# Altium PCB PIDPCB.PcbDoc
Units mm, origin at the board's own origin, x right, y up, seen from the top; angles counter-clockwise.
Board outline 129.54 x 78.49 mm, 2 copper layers (Top Layer, Bottom Layer); 55 components, 89 nets, 166 pads, 6 vias.
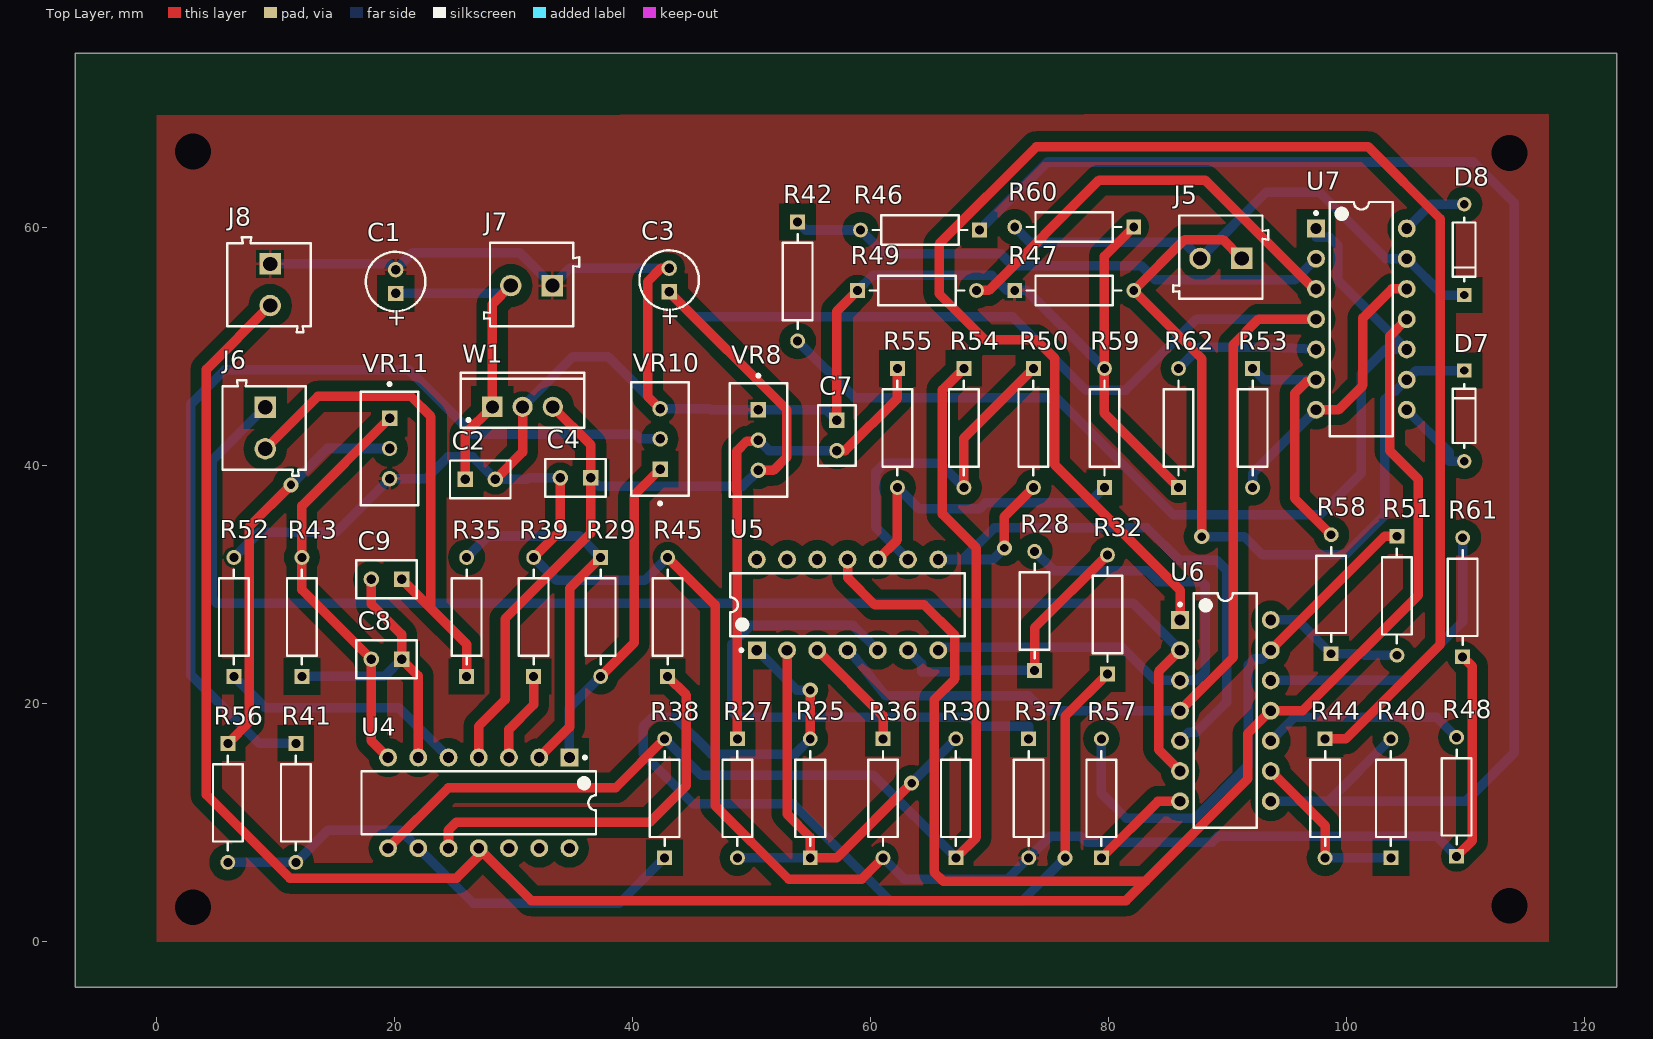
[diagram p0: Top Layer view]
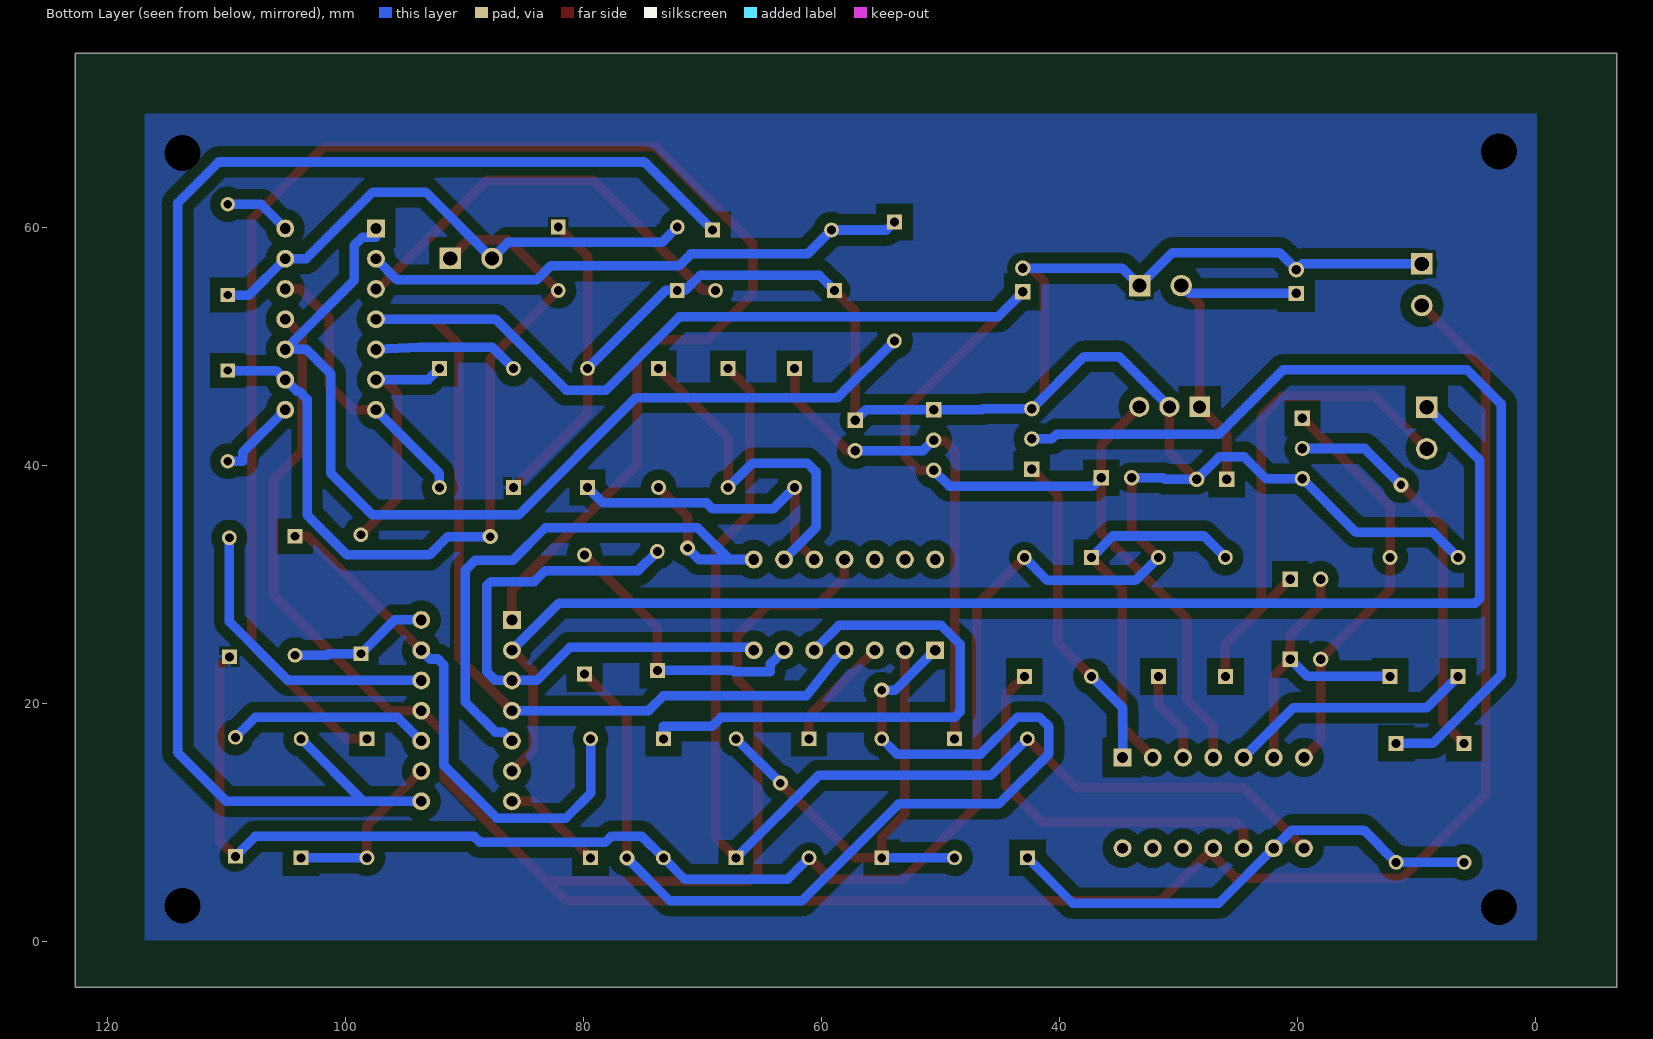
[diagram p1: Bottom Layer view, seen from below]
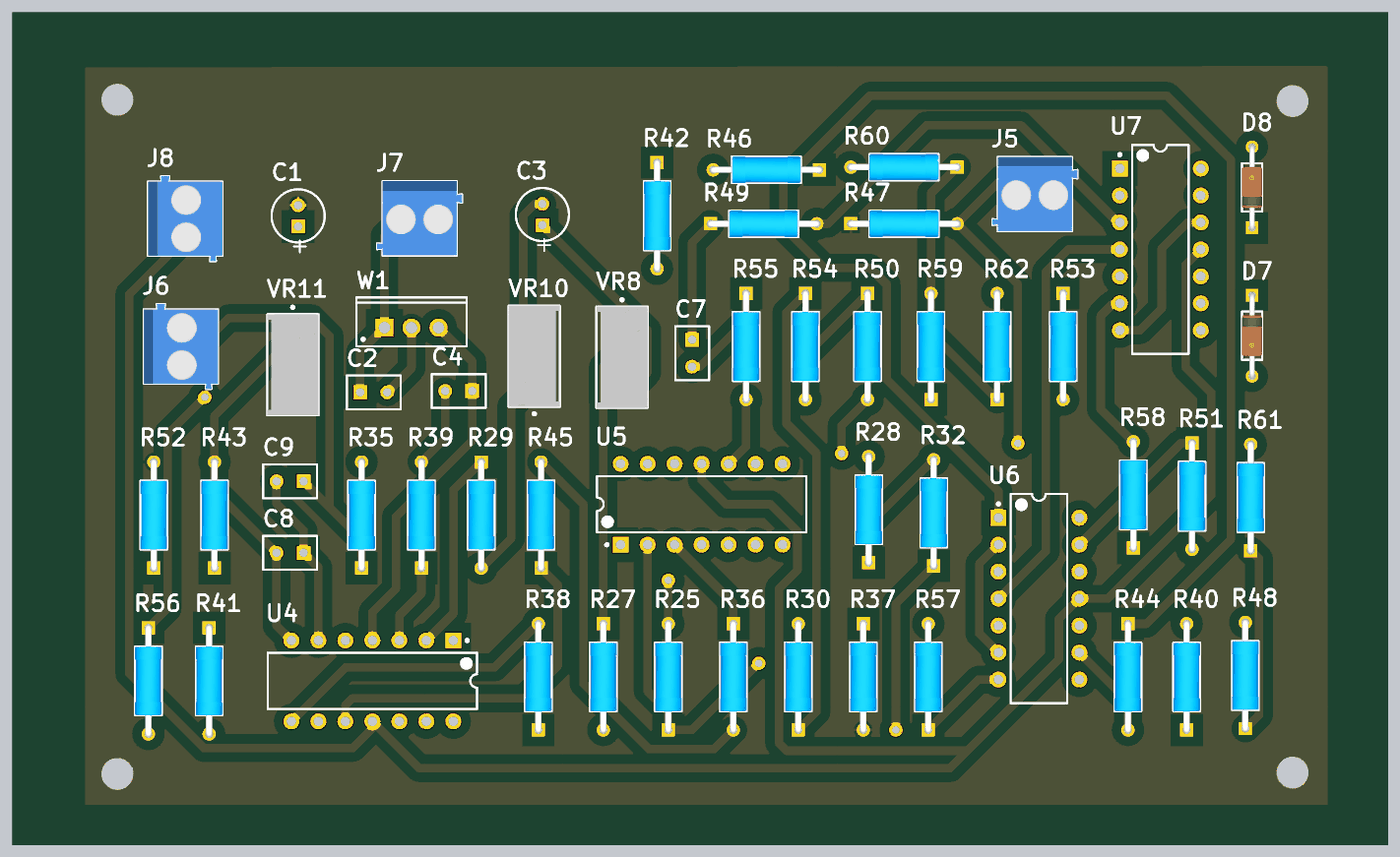
[diagram p2: 3D render of the assembled board from above, using the file's embedded part models]

## Layer stack, top to bottom
Top Solder: solder mask 0.0102, Solder Resist, Dk 3.5
Top Layer: signal copper 0.0356
Dielectric 1: dielectric 0.32, FR-4, Dk 4.8
Bottom Layer: signal copper 0.0356
Bottom Solder: solder mask 0.0102, Solder Resist, Dk 3.5

## Board outline
-6.858,-3.81 122.682,-3.81 122.682,74.676 -6.858,74.676

## Design rules (kind name [scope] priority, off if disabled: settings)
Clearance "Copper Pour" [InPolygon] p1: gap=0.9 ignorepadtopadclearanceinfootprint=FALSE
Clearance [All] p2: gap=0.254 ignorepadtopadclearanceinfootprint=FALSE except(0: Arc-Hole Track-Hole SMDPad-Hole THPad-Hole Via-Hole Fill-Hole Poly-Hole Region-Hole Text-Hole; 1: Arc-Arc Arc-Track Track-Track)
PlaneClearance PlaneClearance_1 [All] p1: clearance=0.508
PolygonConnect [All] p1: connectstyle=Relief reliefconductorwidth=0.254 reliefentries=4 polygonreliefangle="90 Angle" airgapwidth=0.254
RoutingVias [All] p1: holewidth=0.711 width=1.27 viastyle="Through Hole" minholewidth=0.711 minwidth=1.27 maxholewidth=0.711 maxwidth=1.27
SolderMaskExpansion [All] p1: expansion=0.102 istentingtop=FALSE
Width Width_2 [All] p1: maxlimit=0.9 minlimit=0.8 preferedwidth=0.8 minimp=50.000000 maximp=50.000000 favimp=50.000000
Width Width_1 [InNet('GND')] p2: maxlimit=1.8 minlimit=1.2 preferedwidth=1.5 minimp=50.000000 maximp=50.000000 favimp=50.000000
Width [InNet('+9')] p3: maxlimit=1.8 minlimit=1.2 preferedwidth=1.5 minimp=50.000000 maximp=50.000000 favimp=50.000000
29 further rules are at their usual default settings.

## Components (designator, comment, footprint, x,y, rotation, side; value= is the part's Value field where it differs from the comment)
C1 "ECA1HM100" CAPPR55-200-1100X500X1200 20.066,55.483 r90 top
C2 "C320C104K5R5TA" CAPR51-254-508X318X736 27.178,38.862 r0 top value=0.1uF
C3 "ECA1HM100" CAPPR55-200-1100X500X1200 43.053,55.61 r90 top
C4 "C320C104K5R5TA" CAPR51-254-508X318X736 35.179,38.989 r180 top value=0.1uF
C7 "C320C104K5R5TA" CAPR51-254-508X318X736 57.15,42.545 r270 top value=0.1uF
C8 "C320C104K5R5TA" CAPR51-254-508X318X736 19.304,23.749 r180 top value=0.1uF
C9 "C320C104K5R5TA" CAPR51-254-508X318X736 19.304,30.48 r180 top value=0.1uF
D7 "1N4148" FP-017AG-MFG 109.855,44.196 r270 top
D8 "1N4148" FP-017AG-MFG 109.855,58.166 r90 top
J5 "691103110002" 691103110002 89.408,57.531 r180 top
J6 "691103110002" 691103110002 9.017,43.18 r270 top
J7 "691103110002" 691103110002 31.496,55.245 r180 top
J8 "691103110002" 691103110002 9.425,55.217 r270 top
R25 "MRS25000C1101FCT00" FP-MRS25-MFG 54.906,12.065 r90 top value=1.1kΩ
R27 "MRS25000C1101FCT00" FP-MRS25-MFG 48.789,12.065 r270 top value=1.1kΩ
R28 "MRS25000C1101FCT00" FP-MRS25-MFG 73.766,27.813 r90 top value=1.1kΩ
R29 "MRS25000C1101FCT00" FP-MRS25-MFG 37.296,27.305 r270 top value=1.1kΩ
R30 "MRS25000C1101FCT00" FP-MRS25-MFG 67.141,12.065 r90 top value=1.1kΩ
R32 "MRS25000C1101FCT00" FP-MRS25-MFG 79.883,27.512 r90 top value=1.1kΩ
R35 "MRS25000C1101FCT00" FP-MRS25-MFG 26.035,27.305 r90 top value=1.1kΩ
R36 "MRS25000C1101FCT00" FP-MRS25-MFG 61.023,12.065 r270 top value=1.1kΩ
R37 "MRS25000C1101FCT00" FP-MRS25-MFG 73.258,12.065 r270 top value=1.1kΩ
R38 "MRS25000C1101FCT00" FP-MRS25-MFG 42.672,12.065 r90 top value=1.1kΩ
R39 "MRS25000C1101FCT00" FP-MRS25-MFG 31.665,27.305 r90 top value=1.1kΩ
R40 "MRS25000C1101FCT00" FP-MRS25-MFG 103.696,12.065 r90 top value=1.1kΩ
R41 "MRS25000C1101FCT00" FP-MRS25-MFG 11.684,11.684 r270 top value=1.1kΩ
R42 "MRS25000C1101FCT00" FP-MRS25-MFG 53.848,55.499 r270 top value=1.1kΩ
R43 "MRS25000C1101FCT00" FP-MRS25-MFG 12.192,27.305 r90 top value=1.1kΩ
R44 "MRS25000C1101FCT00" FP-MRS25-MFG 98.171,12.065 r270 top value=1.1kΩ
R45 "MRS25000C1101FCT00" FP-MRS25-MFG 42.926,27.305 r90 top value=1.1kΩ
R46 "MRS25000C1101FCT00" FP-MRS25-MFG 64.135,59.817 r180 top value=1.1kΩ
R47 "MRS25000C1101FCT00" FP-MRS25-MFG 77.089,54.737 r0 top value=1.1kΩ
R48 "MRS25000C1101FCT00" FP-MRS25-MFG 109.22,12.192 r90 top value=1.1kΩ
R49 "MRS25000C1101FCT00" FP-MRS25-MFG 63.881,54.737 r0 top value=1.1kΩ
R50 "MRS25000C1101FCT00" FP-MRS25-MFG 73.66,43.18 r270 top value=1.1kΩ
R51 "MRS25000C1101FCT00" FP-MRS25-MFG 104.204,29.083 r270 top value=1.1kΩ
R52 "MRS25000C1101FCT00" FP-MRS25-MFG 6.477,27.305 r90 top value=1.1kΩ
R53 "MRS25000C1101FCT00" FP-MRS25-MFG 92.075,43.18 r270 top value=1.1kΩ
R54 "MRS25000C1101FCT00" FP-MRS25-MFG 67.818,43.18 r270 top value=1.1kΩ
R55 "MRS25000C1101FCT00" FP-MRS25-MFG 62.23,43.18 r270 top value=1.1kΩ
R56 "MRS25000C1101FCT00" FP-MRS25-MFG 5.969,11.684 r270 top value=1.1kΩ
R57 "MRS25000C1101FCT00" FP-MRS25-MFG 79.375,12.065 r90 top value=1.1kΩ
R58 "MRS25000C1101FCT00" FP-MRS25-MFG 98.679,29.21 r90 top value=1.1kΩ
R59 "MRS25000C1101FCT00" FP-MRS25-MFG 79.629,43.18 r90 top value=1.1kΩ
R60 "MRS25000C1101FCT00" FP-MRS25-MFG 77.089,60.071 r180 top value=1.1kΩ
R61 "MRS25000C1101FCT00" FP-MRS25-MFG 109.728,28.956 r90 top value=1.1kΩ
R62 "MRS25000C1101FCT00" FP-MRS25-MFG 85.852,43.18 r90 top value=1.1kΩ
U4 "LM324N" N0014A 27.051,11.684 r270 top
U5 "LM324N" N0014A 58.039,28.321 r90 top
U6 "LM324N" N0014A 89.789,19.431 r0 top
U7 "LM324N" N0014A 101.219,52.324 r0 top
VR8 "3296W-1-103LF" BOUR-3296W 50.546,42.164 r270 top
VR10 "3296W-1-103LF" BOUR-3296W 42.291,42.258 r90 top
VR11 "3296W-1-103LF" BOUR-3296W 19.558,41.458 r270 top
W1 "L7809CV" TO220 30.734,44.958 r0 top

## Footprints (in the part's own frame and the unit in brackets; to place one, negate y for a bottom-side part, rotate by r counter-clockwise, add the part's x,y. Pads: shape width x height; smd on the part's side, far side on the other; paste and mask are expansions set on the pad)
691103110002 [mm] "3,50mm - modular - blue - Horizontal wire entry - Pressure clamp - 8,4mm height - 02p"
  rect 1.8x1.8 hole 1.2: 1(-1.75,0.1)
  round 1.8 hole 1.2: 2(1.75,0.1)
  silkscreen extent -4,-3.5 4,3.5, body extent -4,-3.5 4,3.5, height 8.45
BOUR-3296W [mm] "THD, 3-Leads, Body 9.53x4.83mm, Pitch 2.54mm"
  rect 1.3x1.3 hole 0.8: 1(-2.54,0)
  round 1.3 hole 0.8: 2(0,0) 3(2.54,0)
  silkscreen extent -5.54,-2.41 4.76,2.42, body extent -4.76,-2.4 4.76,2.42, height 11.55
CAPPR55-200-1100X500X1200 [mm] "THD, 2-Leads, Dia 5mm, Body Length 11mm"
  rect 1.3x1.3 hole 0.8: 1(-1,0)
  round 1.3 hole 0.8: 2(1,0)
  silkscreen extent -2.5,-2.5 2.5,2.5, body extent -2.5,-2.5 2.5,2.5, height 12
CAPR51-254-508X318X736 [mm] "THD, 2-Leads, Body 5.08x3.18mm"
  rect 1.3x1.3 hole 0.8: 1(-1.27,0)
  round 1.3 hole 0.8: 2(1.27,0)
  silkscreen extent -2.54,-1.59 2.54,1.59, body extent -2.54,-1.59 2.54,1.59, height 7.36
FP-017AG-MFG [mm]
  rect 1.2x1.2 hole 0.7 paste-1000 mask+0: 1(-3.813,0)
  round 1.2 hole 0.7 paste-1000 mask+0: 2(3.813,0)
  silkscreen extent -2.68,-0.95 2.68,0.95, body extent -4.51,-1.05 4.51,1.05, height 0.25
FP-MRS25-MFG [mm]
  rect 1.25x1.25 hole 0.75 paste-1000 mask+0: 1(-5,0)
  round 1.25 hole 0.75 paste-1000 mask+0: 2(5,0)
  silkscreen extent -3.97,-1.25 3.97,1.25, body extent -5.72,-1.35 5.72,1.35, height 0.25
N0014A [mm] "DIP, 14-Leads, Body 19.7x6.6mm, Pitch 2.54mm"
  rect 1.5x1.5 hole 0.9: 1(-3.81,7.62)
  round 1.5 hole 0.9: 2(-3.81,5.08) 3(-3.81,2.54) 4(-3.81,0) 5(-3.81,-2.54) 6(-3.81,-5.08) 7(-3.81,-7.62) 8(3.81,-7.62) 9(3.81,-5.08) 10(3.81,-2.54) 11(3.81,0) 12(3.81,2.54) 13(3.81,5.08) 14(3.81,7.62)
  silkscreen extent -3.93,-9.85 2.65,9.85, body extent -3.95,-9.85 3.95,9.85, height 5.08
TO220 [mm] "TO, Thru-Hole, Vertical, Heatsink Mounted; 3 In-Line Leads; Pitch 2.54 mm"
  rect 1.7x1.7 hole 1.1: 1(-2.54,0)
  round 1.7 hole 1.1: 2(0,0) 3(2.54,0)
  silkscreen extent -5.2,-1.75 5.2,2.85, body extent -5.25,-1.8 5.25,2.9, height 19.7

## Part data
C1 C3: library part CMP-1665-00038-2, "Aluminum Electrolytic Capacitor, 10 uF, +/- 20%, 50 V, -40 to 85 degC, 2-Pin THD, RoHS, Bulk", Capacitance=10uF, Case/Package=Radial, Dielectric Material=Aluminium, Leakage Current=3uA, Manufacturer=Panasonic, Max Operating Temperature=85degC, Min Operating Temperature=-40degC, Package Description="2-Pin Radial Lead, Dia 5 mm, Height 12 mm", Package Quantity=200, Package Reference=CAPPR55-200-1100X500X1200, Ripple Current=65mA, Tolerance=20%, Voltage=50V, Datasheet URL=https://industrial.panasonic.com/cdbs/www-data/pdf/RDF0000/ABA0000C1218.pdf, Datasheet Version="Rev. 05, 10/2016", Diameter=5mm, Dissipation Factor=0.12%, Height=11mm, Height - Seated (Max)=0.472inch, Lead Diameter=0.5mm, Lead Free=LeadFree, Lead Pitch=2mm, Lead/Base Style=Straight, Length=11mm, Life (Hours)=2000Hour, Manufacturer URL=http://www.panasonic.com/, Mount=ThroughHole, Number of Pins=2, Packaging=Bulk, Radiation Hardening=No, REACH SVHC=NoSVHC, Ripple Current (AC)=65mA, RoHSCompliant=true, Termination=Radial, Voltage Rating=50V, Voltage Rating (DC)=50V
C2 C4 C7 C8 C9: library part CMP-1664-00004-1, "Radial Leaded Multilayer Ceramic Capacitor, 0.1 uF, +/- 10%, 50 V, -55 to 125 degC, 2-Pin THD, RoHS, Tape and Reel", Case\Package=SOT-23-5, Dropout Voltage="260 mV", Max Input Voltage="8 V", Max Operating Temperature="85 degC", Max Power Dissipation="250 mW", Min Operating Temperature="-40 degC", Output Current="150 mA", Output Voltage="5 V", Package Quantity=3000, ComponentLink1Description="Manufacturer URL", ComponentLink1URL=http://www.kemet.com/, ComponentLink2Description=Datasheet, ComponentLink2URL=http://www.kemet.com/docfinder?Partnumber=C320C104K5R5TA, DatasheetVersion=Dec-15, Height="1.3 mm", Length="3 mm", Mount="Surface Mount", Outputs=1, PackageDescription="2-Pin Through Hole Device, Body 5.08 x 3.18 mm, Pitch 2.54 mm", PackageReference=CAPR51-254-508X318X736, Packaging="Tape and Reel", Pins=5, Radiation Hardening=No, RoHSCompliant=true, Width="1.8 mm"
D7 D8: library part CMP-07163-000046-1, "DIODE GEN PURP 100V 200MA DO35", Average Rectified Current=200mA, Capacitance=4pF, Case/Package=DO-35, Current=4A, Forward Current=300mA, Forward Voltage=1V, Max Forward Surge Current (Ifsm)=1A, Max Operating Temperature=175°C, Max Power Dissipation=500mW, Max Repetitive Reverse Voltage (Vrrm)=100V, Max Reverse Current=5uA, Min Operating Temperature=-65°C, Package Quantity=2000, Contact Plating=Tin, Current Rating=200mA, Diameter=1.91mm, Element Configuration=Single, Height=4.56mm, Lead Free="Lead Free", Length=4.56mm, Max Reverse Voltage (DC)=100V, Max Surge Current=4A, Mount="Through Hole", Number of Pins=2, Output Current=200mA, Outside Diameter=1.85mm, Packaging=Bulk, Peak Non-Repetitive Surge Current=4A, Polarity=Standard, Power Dissipation=500mW, Radiation Hardening=No, REACH SVHC="No SVHC", Recovery Time=4ns, Reverse Recovery Time=4ns, Reverse Voltage=100V, Series=-, Voltage=100V, Voltage Rating (DC)=100V, Weight=0.01lb, Width=1.91mm
J5 J6 J7 J8: library part CMP-1502-03254-1, "Series 1031 - 3.50 mm Horizontal Entry Modular with Pressure Clamp WR-TBL, 2 pin", Manufacturer="Wurth Elektronik", Operating Temperature=-40to105degC, Datasheet URL=http://katalog.we-online.de/em/datasheet/6911031100xx.pdf, Manufacturer URL=http://www.we-online.de, Mounting Technology=THT, Package Reference=691103110002, Packaging=Box, Part Number=691103110002, Pin Number=2, Pitch=3.50mm, Publisher=WurthElektronik
R25 R27 R28 R29 R30 R32 R35 R36 R37 R38 R39 R40 R41 R42 R43 R44 R45 R47 R48 R49 R50 R51 R52 R53 R54 R55 R56 R57 R59 R60 R61 R62: library part CMP-02408-000003-1, "RES 1.1K OHM 0.6W 1% AXIAL", Manufacturer="Vishay BC Components", Package=MRS25, Power Rating=0.6W, Resistance=10kΩ, Temperature="-55°C to +155°C", Temperature Coefficient=50ppm/°C, Temperature Range High=+155°C, Temperature Range Low=-55°C, Tolerance=1%, Voltage Rating=350V, Automotive=No, Category=Res, ComponentLink2Description=Datasheet, ComponentLink2URL=http://www.vishay.com/docs/28724/mrs16m25.pdf, Composition="Thin Film", Device Class L1="Passive Components", Device Class L2=Resistors, Device Class L3="Through-Hole Resistors", Digikey Description="RES 1.1K OHM 0.6W 1% AXIAL", Height=2.5mm, Ipc Land Pattern Name=RESAD1000W75L650D250, Lead Free=Yes, Manufacturer Part Number=MRS25000C1101FCT00, Mouser Description="Thin Film Resistors .6watt 1.1Kohms 1%", Octopart=https://octopart.com/mrs25000c1101fct00-vishay-43740214, RoHS=TRUE, Series=MRS25
R46 R58: library part CMP-02408-000003-1, "RES 1.1K OHM 0.6W 1% AXIAL", Manufacturer="Vishay BC Components", Package=MRS25, Power Rating=0.6W, Resistance=15kΩ, Temperature="-55°C to +155°C", Temperature Coefficient=50ppm/°C, Temperature Range High=+155°C, Temperature Range Low=-55°C, Tolerance=1%, Voltage Rating=350V, Automotive=No, Category=Res, ComponentLink2Description=Datasheet, ComponentLink2URL=http://www.vishay.com/docs/28724/mrs16m25.pdf, Composition="Thin Film", Device Class L1="Passive Components", Device Class L2=Resistors, Device Class L3="Through-Hole Resistors", Digikey Description="RES 1.1K OHM 0.6W 1% AXIAL", Height=2.5mm, Ipc Land Pattern Name=RESAD1000W75L650D250, Lead Free=Yes, Manufacturer Part Number=MRS25000C1101FCT00, Mouser Description="Thin Film Resistors .6watt 1.1Kohms 1%", Octopart=https://octopart.com/mrs25000c1101fct00-vishay-43740214, RoHS=TRUE, Series=MRS25
U4 U5 U6 U7: library part CMP-0055-00082-3, "Low Power Quad Operational Amplifier, 14-pin MDIP", Manufacturer="Texas Instruments", Package Reference=N0014A, PackageTopMarking=NSUZXYYTTE#*LM324N, PowerWise=N, Code_JEDEC=MS-001-AA, ComponentLink1Description="Datasheet URL", ComponentLink1URL=http://www.ti.com/general/docs/lit/getliterature.tsp?genericPartNumber=LM324&fileType=pdf, CompType=Amplifiers, PackageDescription="MDIP, .750 x .250 x.130in, 14 Lead, .100in Pitch", PinCount=14, RoHS=N
VR8 VR10 VR11: library part CMP-1747-00001-1, "Square Trimpot(R) Trimming Potentiometer, 10 KOhm, +/- 10%, 0.5 W, -55 to 125 degC, 3-Pin THD, RoHS, Tube", Case Code (Imperial)=0603, Case Code (Metric)=1608, Max Operating Temperature="155 degC", Min Operating Temperature="-55 degC", Package Quantity=5000, Power Rating="100 mW", Resistance=10k, Tolerance=1%, Type (Resistor)="Thick Film", Voltage Rating="75 V", Case\Package=0603, ComponentLink1Description="Manufacturer URL", ComponentLink1URL=http://www.bourns.com/, ComponentLink2Description=Datasheet, ComponentLink2URL=http://www.bourns.com/docs/Product-Datasheets/3296.pdf, DatasheetVersion=May-16, Height="0.45 mm", Length="1.55 mm", Mount="Surface Mount", PackageDescription="3-Pin Through Hole Device, Body 9.53 x 4.83 mm, Pitch 2.54 mm", PackageReference=3296W, Packaging="Tape and Reel", Pins=2, Radiation Hardening=No, REACH SVHC=Unknown, RoHSCompliant=true, Weight="7.1E-05 oz", Width="0.85 mm"
W1: library part CMP-0244-00459-1, "Positive Voltage Regulator, 9V, 3-Pin TO-220", ComponentLink1Description="Manufacturer URL", ComponentLink1URL=http://www.st.com, ComponentLink2Description=Datasheet, ComponentLink2URL=http://www.st.com/internet/com/TECHNICAL_RESOURCES/TECHNICAL_LITERATURE/DATASHEET/CD00000444.pdf, ComponentLink3Description="Package Specification", ComponentLink3URL=http://www.st.com/internet/com/TECHNICAL_RESOURCES/TECHNICAL_LITERATURE/PACKAGE_INFORMATION/CD00004649.pdf, DatasheetVersion=16/11/2011, PackageDescription="TO, Thru-Hole, Vertical, Heatsink Mounted; 3 In-Line Leads; Pitch 2.54 mm", PackageReference=TO220, PackageVersion=ver3.0

## Free pads (board coordinates)
  round 1.524 hole 3: 1(3.048,2.921) 1(3.048,66.421) 1(113.665,3.048) 1(113.665,66.294)

## Via types
v1: diameter 1.27, hole 0.711, Top Layer to Bottom Layer, 6 vias

## Nets (pads, with @x,y where several pads share a name; then routed paths per layer and width w, separated by ;. In a path a pad name is that pad's centre, name@x,y a point inside that pad or via, vN(x,y) a via of type N, cw(c..) or ccw(c..) an arc to the next point about the centre after c; other vN are vias at no path point)
+5: 
+9: C3.1 C4.1 U4.4 U5.4 U6.4 U7.4 VR8.3 W1.3 | length 201.4
  Top Layer w0.8: U4.4 27.051,18.136 29.264,20.348 29.264,27.152 36.449,34.337 C4.1 36.449,41.783 W1.3 ; C3.1 52.934,44.729 52.934,40.742 51.816,39.624 VR8.3 ; U6.4 90.449,23.901 90.449,50.19 92.583,52.324 U7.4
  Bottom Layer w0.8: C4.1 37.135,38.303 49.225,38.303 VR8.3 ; C3.1 45.136,52.527 71.907,52.527 78.08,46.355 81.407,46.355 87.376,52.324 U7.4 ; U5.4 58.779,23.771 61.236,20.665 73.264,20.665 74.498,19.431 U6.4
-9: J8.2 U4.11 U5.11 U6.11 U7.11 | length 240
  Top Layer w0.8: J8.2 4.169,48.111 4.169,12.366 11.176,5.359 25.186,5.359 U4.11@27.376,7.549 ; U4.11 U4.11@27.376,7.549 ; U5.11 58.039,30.607 60.325,28.321 64.491,28.321 67.063,25.749 67.063,22.098 65.329,20.364 65.329,5.842 66.065,5.105 83.083,5.105 ; U7.11 103.607,50.902 103.607,41.25 106.004,38.853 106.004,29.143 96.291,19.431 U6.11 91.669,17.501 91.669,13.691 83.083,5.105 ; U4.11@27.376,7.549 31.46,3.465 81.443,3.465 83.083,5.105
GND: C1.2 C2.2 C3.2 C4.2 C7.1 J7.1 J8.1 pad.1@3.048,2.921 pad.1@3.048,66.421 pad.1@113.665,66.294 R36.2 R37.2 R39.2 R45.2 R47.1 R48.1 R49.1 R52.2 R59.2 R60.1 R61.1 R62.1 VR8.1 VR10.3 VR11.3 W1.2 | length 309.9
  Top Layer w0.8: C2.2 30.734,41.148 W1.2 ; R39.2 33.909,34.549 C4.2 ; VR10.3 41.253,45.836 41.253,55.489 42.374,56.61 C3.2 ; R45.2 46.917,28.314 46.917,11.454 53.106,5.265 59.223,5.265 R36.2 ; C7.1 57.15,53.006 R49.1 ; R60.1 79.629,57.611 R59.2 79.629,44.403 R62.1 ; R48.1 110.515,8.487 110.515,23.169 R61.1
  Bottom Layer w0.8: R52.2 8.583,34.411 15.051,34.411 VR11.3 22.611,38.918 24.46,40.767 26.543,40.767 C2.2 31.115,38.862 31.242,38.989 C4.2 ; J8.1 19.582,56.967 C1.2 21.495,57.912 30.479,57.912 J7.1 34.711,56.61 C3.2 ; W1.2 34.959,49.183 37.906,49.183 VR10.3 46.431,44.798 46.525,44.704 VR8.1 56.261,44.704 C7.1 ; R39.2 33.592,30.378 40.999,30.378 R45.2 ; R49.1 60.16,56.016 70.16,56.016 71.439,54.737 R47.1 73.072,54.737 R59.2 ; R36.2 62.824,5.265 71.458,5.265 R37.2 75.083,8.89 77.613,8.89 78.127,8.376 80.763,8.376 80.769,8.382 88.675,8.382 89.158,8.865 107.547,8.865 R48.1
NetC1_1: C1.1 C2.1 J7.2 W1.1 | length 27.8
  Top Layer w0.8: C2.1 25.908,42.672 W1.1 28.194,53.593 J7.2
  Bottom Layer w0.8: C1.1 29.084,54.483 J7.2
NetC5_1: 
NetC5_2: 
NetC6_2: 
NetC7_2: C7.2 R27.1 R55.1 VR8.2 | length 42.8
  Top Layer w0.8: R27.1 48.789,37.824 48.746,37.867 48.746,41.253 49.561,42.068 50.45,42.068 VR8.2 ; C7.2 57.836,41.275 62.23,45.669 R55.1
  Bottom Layer w0.8: VR8.2 51.435,41.275 C7.2
NetC8_1: C8.1 C9.2 R43.1 U4.6 | length 25.6
  Top Layer w0.8: C9.2 18.034,28.372 20.574,25.832 C8.1 21.971,22.352 U4.6
  Bottom Layer w0.8: R43.1 19.13,22.305 C8.1
NetC8_2: C8.2 R43.2 U4.7 VR11.1 | length 34.6
  Top Layer w0.8: U4.7 18.034,16.891 C8.2 12.192,29.591 R43.2 12.192,36.632 VR11.1
NetC9_1: C9.1 J6.2 R35.1 | length 43
  Top Layer w0.8: J6.2 13.534,45.847 21.336,45.847 23.038,44.145 23.038,28.016 ; C9.1 23.038,28.016 ; R35.1 26.035,25.019 23.038,28.016
NetD1_2: 
NetD2_2: 
NetD3_2: 
NetD4_2: 
NetD5_2: 
NetD6_2: 
NetD7_1: D7.1 J5.1 R47.2 U7.9 | length 69.3
  Top Layer w0.8: v1(87.808,34.061) 87.808,49.018 R47.2 86.356,59.004 89.585,59.004 J5.1
  Bottom Layer w0.8: v1(87.808,34.061) 91.373,34.061 92.923,32.512 99.831,32.512 103.2,35.881 103.2,45.593 103.886,46.279 104.064,46.279 U7.9 105.794,48.009 D7.1
NetD7_2: D7.2 U7.8 | length 7.1
  Bottom Layer w0.8: U7.8 108.585,41.148 108.585,40.383 D7.2
NetD8_1: D8.1 J5.2 R60.2 U7.13 | length 44.7
  Bottom Layer w0.8: R60.2 73.384,58.776 86.313,58.776 J5.2 93.219,62.992 97.689,62.992 103.277,57.404 U7.13 108.08,54.353 D8.1
NetD8_2: D8.2 U7.14 | length 5.7
  Bottom Layer w0.8: U7.14 107.064,61.979 D8.2
NetDS1_2: 
NetDS2_1: 
NetDS3_2: 
NetDS4_1: 
NetDS5_2: 
NetDS6_1: 
NetDS7_2: 
NetDS8_1: 
NetDS9_2: 
NetDS10_1: 
NetDS11_2: 
NetDS12_1: 
NetDS13_2: 
NetDS14_2: 
NetG1_1: 
NetG1_2: 
NetG1_3: 
NetJ2_1: 
NetJ2_2: 
NetJ6_1: J6.1 U6.2 U6.6 | length 112.7
  Top Layer w0.8: U6.6 84.179,16.151 84.179,22.711 U6.2
  Bottom Layer w0.8: J6.1 4.674,40.487 4.674,28.829 5.029,28.473 82.017,28.473 U6.2
NetR4_2: 
NetR5_1: 
NetR5_2: 
NetR8_1: 
NetR9_2: 
NetR12_2: 
NetR13_1: 
NetR16_2: 
NetR20_1: 
NetR22_2: 
NetR24_2: 
NetR25_1: R25.1 R27.2 R30.2 U5.2 | length 40.7
  Top Layer w0.8: U5.2 52.959,10.736 54.906,8.788 R25.1 57.141,7.065 v1(63.42,13.344)
  Bottom Layer w0.8: R27.2 R25.1 ; v1(63.42,13.344) R30.2
NetR25_2: R25.2 R32.1 U5.1 | length 87.4
  Top Layer w0.8: R25.2 v1(54.906,21.158) ; v1(76.327,7.061) 76.327,18.956 R32.1
  Bottom Layer w0.8: U5.1 53.772,21.158 v1(54.906,21.158) ; R25.2 53.627,15.786 46.607,15.786 43.52,18.872 41.656,18.872 40.869,18.085 40.869,15.799 45.06,11.608 53.467,11.608 61.62,3.454 72.72,3.454 v1(76.327,7.061)
NetR28_1: R28.1 R32.2 U5.6 | length 24
  Top Layer w0.8: R28.1 73.766,26.395 R32.2
  Bottom Layer w0.8: U5.6 64.27,23.36 64.27,22.711 67.357,22.711 67.459,22.813 R28.1
NetR28_2: R28.2 U5.7 U6.3 | length 46.7
  Bottom Layer w0.8: U5.7 65.888,24.74 81.128,24.74 83.896,21.971 U6.3 87.376,21.971 88.087,22.682 88.087,29.947 87.773,30.261 84.112,30.261 83.182,31.191 75.388,31.191 R28.2
NetR29_1: R29.1 R35.2 U4.2 | length 31.7
  Top Layer w0.8: U4.2 34.688,18.051 34.688,29.697 R29.1
  Bottom Layer w0.8: R35.2 27.835,34.105 35.496,34.105 R29.1
NetR29_2: R29.2 U4.1 VR10.1 | length 27.4
  Top Layer w0.8: R29.2 40.107,25.116 40.107,37.534 VR10.1
  Bottom Layer w0.8: U4.1 34.671,19.68 R29.2
NetR30_1: R30.1 R38.2 R54.1 U4.8 | length 99.4
  Top Layer w0.8: U4.8 24.511,12.954 38.561,12.954 R38.2 ; R30.1 68.863,8.787 68.863,33.093 66.015,35.941 66.015,46.377 R54.1
  Bottom Layer w0.8: R38.2 45.751,13.986 60.22,13.986 R30.1
NetR31_2: 
NetR33_1: 
NetR36_1: R36.1 U5.3 | length 9.7
  Top Layer w0.8: U5.3 61.024,18.987 R36.1
NetR37_1: R37.1 U5.5 | length 45.9
  Bottom Layer w0.8: U5.5 60.579,24.517 58.502,26.594 49.911,26.594 48.308,24.991 48.308,19.352 48.794,18.865 68.428,18.865 69.182,18.11 73.258,18.11 R37.1
NetR38_1: R38.1 R41.2 R56.2 U4.9 | length 42
  Bottom Layer w0.8: R56.2 R41.2 14.398,9.398 20.447,9.398 U4.9 26.594,3.251 38.858,3.251 R38.1
NetR39_1: R39.1 U4.3 | length 7.7
  Top Layer w0.8: U4.3 29.591,17.856 31.665,19.931 R39.1
NetR40_1: R40.1 R44.2 U6.9 | length 14.7
  Top Layer w0.8: U6.9 98.171,9.779 R44.2
  Bottom Layer w0.8: R44.2 R40.1
NetR40_2: R40.2 R46.1 U6.8 | length 124.5
  Bottom Layer w0.8: R46.1 74.85,65.532 110.617,65.532 114.046,62.103 114.046,15.875 109.982,11.811 98.442,11.811 ; U6.8 98.442,11.811 ; R40.2 98.442,11.811
NetR41_1: R41.1 VR10.2 | length 77
  Bottom Layer w0.8: R41.1 8.614,16.684 2.87,22.428 2.87,45.212 5.715,48.057 21.184,48.057 26.568,42.672 40.208,42.672 40.622,42.258 VR10.2
NetR42_1: R42.1 R46.2 U7.2 | length 46.3
  Bottom Layer w0.8: R42.1 54.53,59.817 R46.2 61.136,57.816 70.938,57.816 71.96,56.794 82.728,56.794 83.896,55.626 95.631,55.626 U7.2
NetR42_2: R42.2 U7.1 U7.10 | length 81.9
  Bottom Layer w0.8: R42.2 58.613,45.734 75.551,45.734 85.411,35.874 97.698,35.874 101.219,39.395 101.219,47.752 103.251,49.784 U7.10 99.212,55.601 99.212,58.547 98.552,59.207 97.409,59.207 U7.1
NetR44_1: R44.1 U6.1 | length 139.2
  Top Layer w0.8: U6.1 85.979,29.566 75.463,40.081 75.463,49.022 73.889,50.597 69.596,50.597 65.735,54.458 65.735,58.64 73.897,66.802 101.812,66.802 107.848,60.766 107.848,24.994 99.92,17.065 R44.1
NetR45_1: R45.1 U4.10 | length 32.9
  Top Layer w0.8: U4.10 24.511,9.398 25.146,10.033 41.402,10.033 44.501,13.132 44.501,20.73 R45.1
NetR48_2: R48.2 U6.10 | length 17.1
  Bottom Layer w0.8: U6.10 95.573,18.865 107.547,18.865 R48.2
NetR49_2: R49.2 U7.3 | length 36.2
  Top Layer w0.8: R49.2 69.914,54.737 79.185,64.008 88.087,64.008 97.231,54.864 U7.3
NetR50_1: R50.1 R54.2 U5.9 | length 29.4
  Top Layer w0.8: R54.2 67.818,42.338 R50.1
  Bottom Layer w0.8: U5.9 60.427,34.823 60.427,39.497 61.163,40.234 65.764,40.234 R54.2
NetR50_2: R50.2 U5.8 U6.5 | length 53.2
  Top Layer w0.8: v1(71.222,33.096) 71.222,35.742 R50.2
  Bottom Layer w0.8: U5.8 67.716,32.131 ; v1(71.222,33.096) 70.256,32.131 67.716,32.131 ; U6.5 86.716,17.628 87.376,17.628 89.887,20.139 89.887,31.242 89.049,32.08 85.903,32.08 83.185,34.798 70.383,34.798 67.716,32.131
NetR51_1: R51.1 R57.2 U6.13 | length 45
  Top Layer w0.8: U6.13 103.171,34.083 R51.1
  Bottom Layer w0.8: R57.2 79.375,12.471 81.458,10.389 87.249,10.389 91.722,14.862 91.722,23.284 92.21,23.771 92.859,23.771 U6.13
NetR51_2: R51.2 R58.1 U6.14 | length 11.8
  Bottom Layer w0.8: U6.14 95.838,27.051 R58.1 101.371,24.21 101.498,24.083 R51.2
NetR52_1: R52.1 U4.5 | length 20.9
  Bottom Layer w0.8: R52.1 9.097,19.685 20.32,19.685 U4.5
NetR53_1: R53.1 R58.2 U7.6 | length 21.1
  Top Layer w0.8: U7.6 97.275,47.11 96.64,47.11 95.609,46.079 95.609,37.28 R58.2
  Bottom Layer w0.8: R53.1 93.011,47.244 U7.6
NetR53_2: R53.2 U7.7 U7.12 | length 23.9
  Top Layer w0.8: U7.7 99.289,44.704 101.346,46.761 101.346,52.426 103.784,54.864 U7.12
  Bottom Layer w0.8: R53.2 92.075,39.37 U7.7
NetR55_2: R55.2 R59.1 U5.10 | length 25.6
  Top Layer w0.8: U5.10 62.23,33.782 R55.2
  Bottom Layer w0.8: R55.2 64.03,36.38 69.117,36.38 69.618,36.881 78.33,36.881 R59.1
NetR56_1: R56.1 VR11.2 | length 33.5
  Top Layer w0.8: R56.1 7.772,18.487 7.772,34.9 v1(11.278,38.405)
  Bottom Layer w0.8: v1(11.278,38.405) 14.331,41.458 VR11.2
NetR57_1: R57.1 U6.7 | length 8.6
  Top Layer w0.8: R57.1 84.121,11.811 U6.7
NetR61_2: R61.2 U6.12 | length 25.2
  Bottom Layer w0.8: U6.12 104.8,21.971 109.728,26.899 R61.2
NetR62_2: R62.2 U7.5 | length 12.3
  Bottom Layer w0.8: R62.2 87.652,49.98 93.679,49.98 U7.5
NetR63_1: 
NetU1_2: 
pads on no net: U4.12 U4.13 U4.14 U5.12 U5.13 U5.14

## Polygon pours and split planes (outlines as drawn)
GND on Bottom Layer "GND_L02_P001" (solid, pour order 1): -0.127,69.596 -0.127,0.127 116.84,0.127 116.84,69.596
GND on Top Layer "GND_L01_P000" (solid, pour order 0): 0,69.471 0,0 116.967,0 116.967,69.594

## Text inside footprints (layer, text, board x,y; h text height)
C1: Top Overlay "+" at 20.803,51.575 h1.5 r90
C3: Top Overlay "+" at 43.79,51.702 h1.5 r90